# Altium PCB Copy of Tracking-Car.PcbDoc
Units mil, origin at the board's own origin, x right, y up, seen from the top; angles counter-clockwise.
Board outline 2952.76 x 3790 mil, 2 copper layers (Top Layer, Bottom Layer); 70 components, 64 nets, 287 pads, 50 vias.
Unrouted connection lines stored in the file: 9.
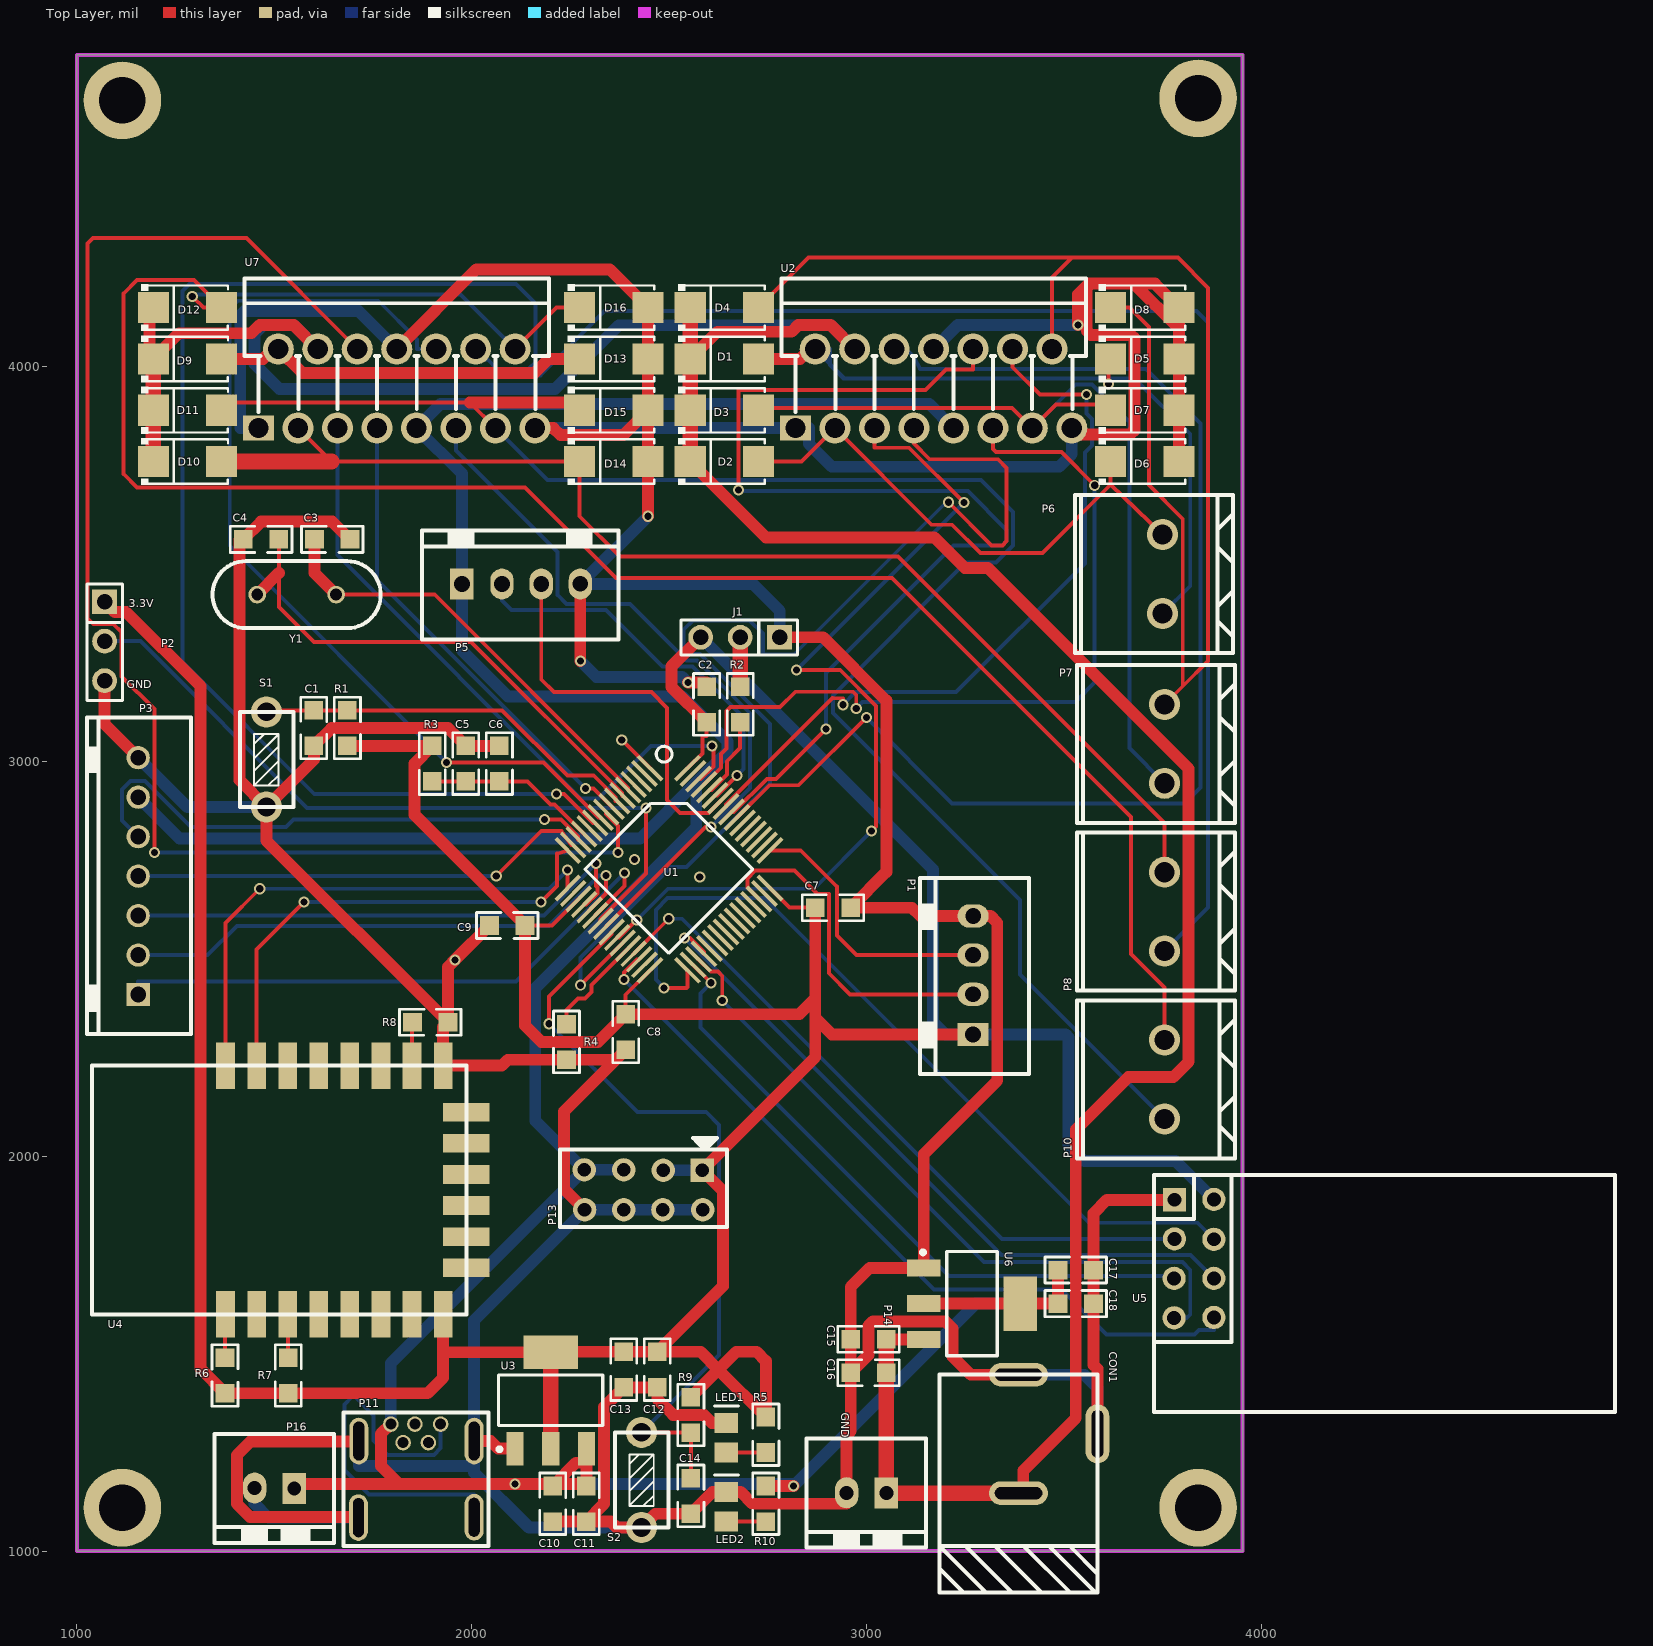
[diagram p0: Top Layer view]
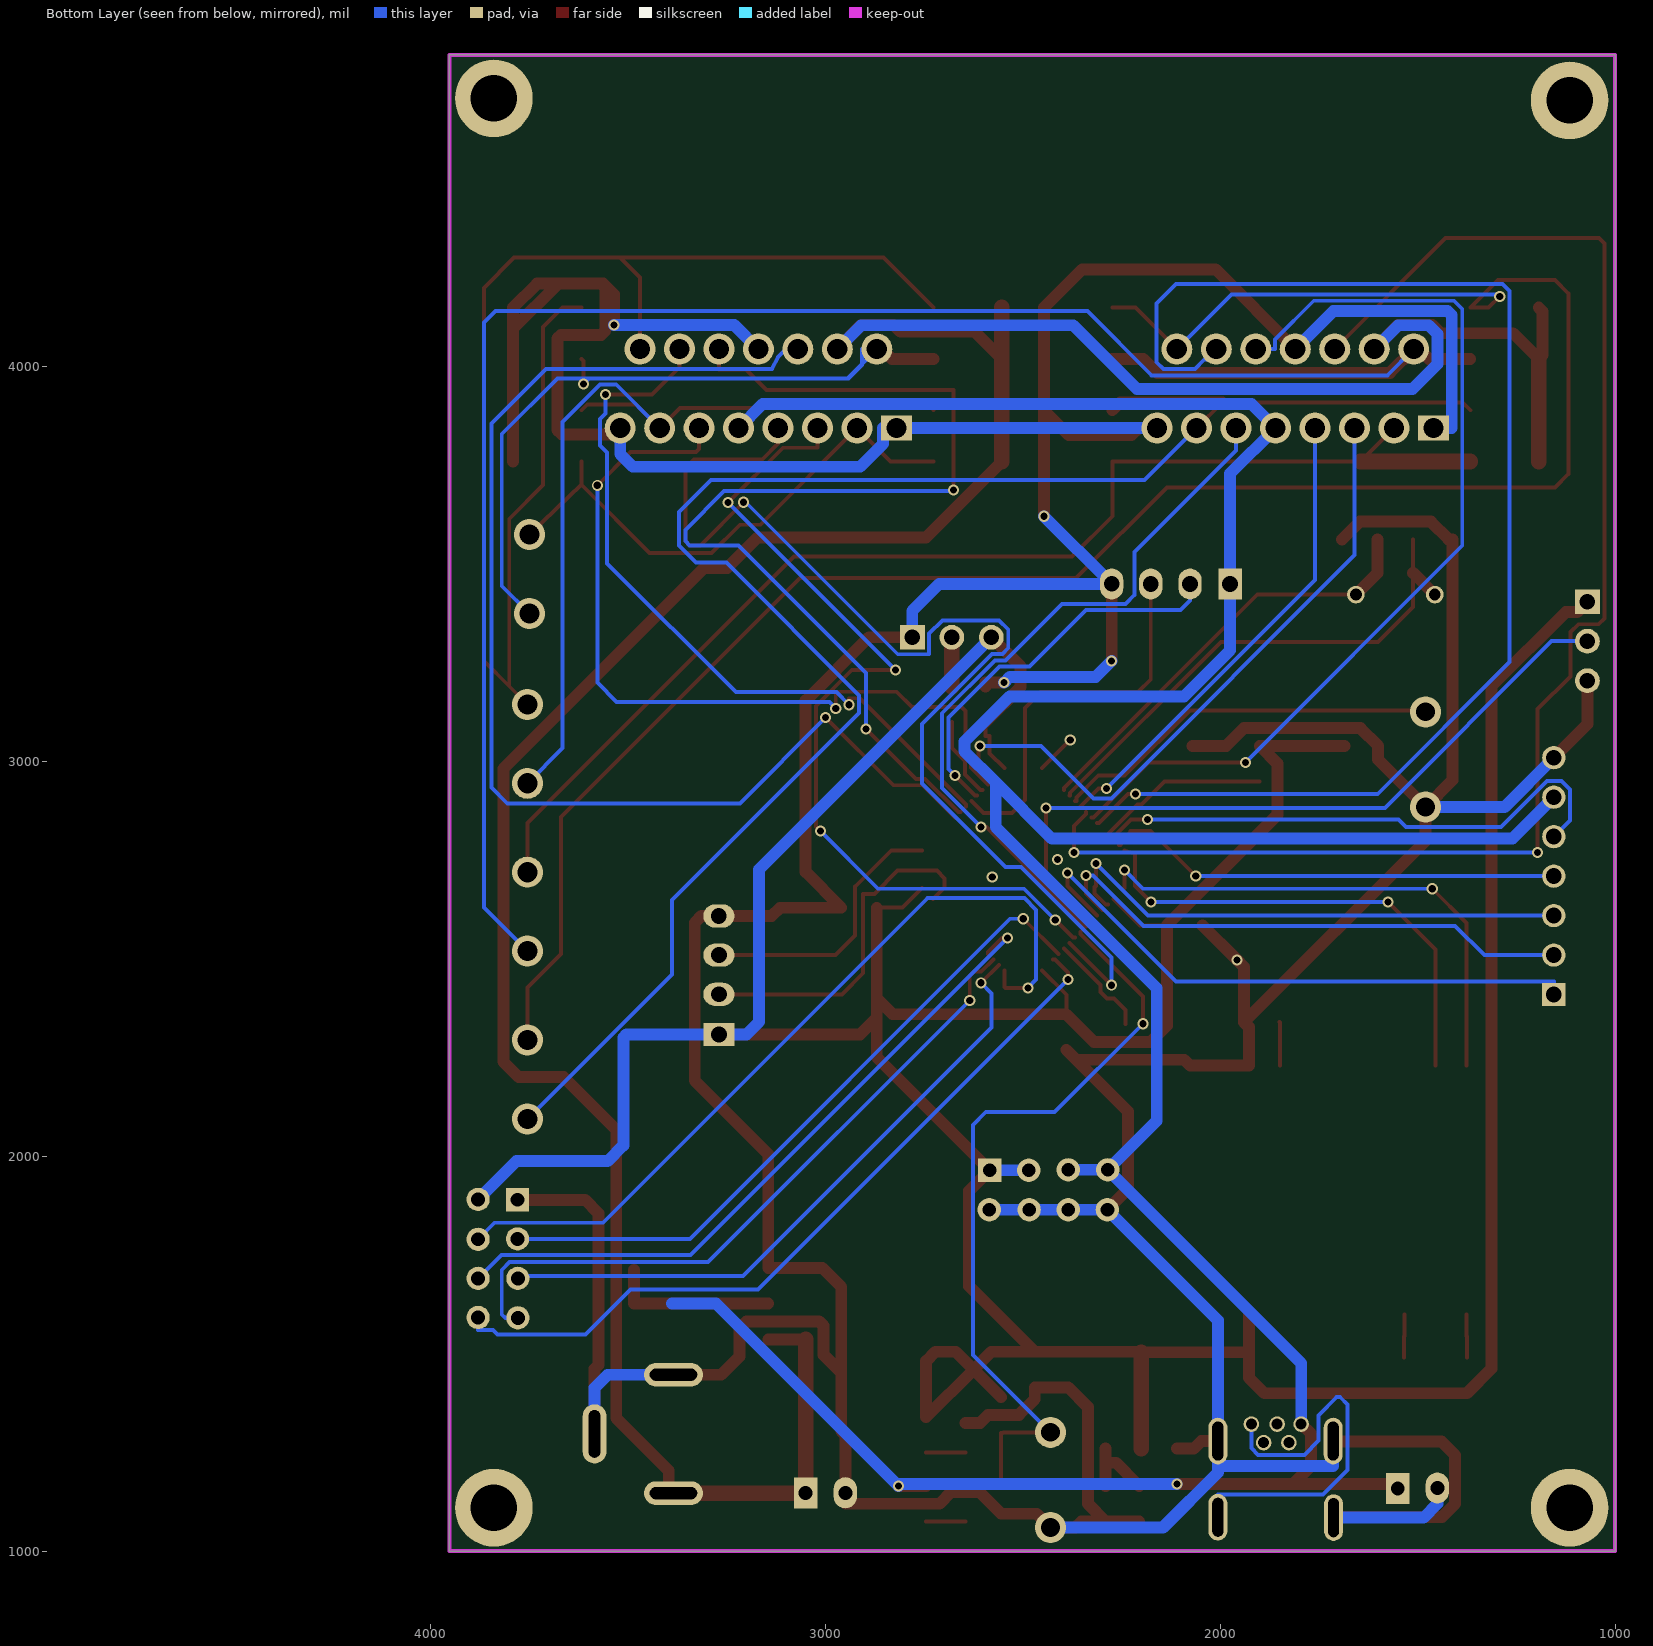
[diagram p1: Bottom Layer view, seen from below]

## Layer stack, top to bottom
Top Solder: solder mask 0.4, Solder Resist, Dk 3.5
Top Layer: signal copper 1.4
Dielectric 1: dielectric 12.6, FR-4, Dk 4.8
Bottom Layer: signal copper 1.4
Bottom Solder: solder mask 0.4, Solder Resist, Dk 3.5

## Board outline
1000,1000 3952.76,1000 3952.76,4790 1000,4790

## Design rules (kind name [scope] priority, off if disabled: settings)
Clearance [All] p1: gap=6 ignorepadtopadclearanceinfootprint=FALSE
HoleSize [All] p1: absolutevalues=TRUE maxlimit=300 minlimit=1 maxpercent=80.000 minpercent=20.000
PolygonConnect [All] p1: connectstyle=Relief reliefconductorwidth=10 reliefentries=4 polygonreliefangle="90 Angle" airgapwidth=10
RoutingVias [All] p1: holewidth=18 width=28 viastyle="Through Hole" minholewidth=18 minwidth=28 maxholewidth=18 maxwidth=28
SolderMaskExpansion [All] p1: expansion=4 istentingtop=FALSE
Width Width_5V [InNet('5V')] p1: maxlimit=40 minlimit=10 preferedwidth=30
Width Width_12V [InNet('12V')] p2: maxlimit=40 minlimit=10 preferedwidth=30
Width Width_3.3V [InNet('3.3V')] p3: maxlimit=40 minlimit=10 preferedwidth=30
Width Width_GND [InNet('GND')] p4: maxlimit=40 minlimit=10 preferedwidth=30
Width [All] p5: maxlimit=40 minlimit=10 preferedwidth=10 minimp=50.000000 maximp=50.000000 favimp=50.000000
29 further rules are at their usual default settings.

## Components (designator, comment, footprint, x,y, rotation, side; value= is the part's Value field where it differs from the comment)
C1 "104" 0805 1600,3040 r90 top
C2 "104" 0805 2595,3190 r270 top
C3 "22P" 0805 1691.5,3562.98 r180 top
C4 "22P" 0805 1421.5,3562.98 r0 top
C5 "10uF" 0805 1985,2950 r90 top
C6 "104" 0805 2070,2950 r90 top
C7 "104" 0805 2870,2630 r0 top
C8 "104" 0805 2390,2360 r270 top
C9 "104" 0805 2135,2585 r180 top
C10 "10uF" 0805 2205,1075 r90 top
C11 "104" 0805 2290,1075 r90 top
C12 "10uF" 0805 2470,1415 r90 top
C13 "104" 0805 2385,1415 r90 top
C14 "104" 0805 2555,1095 r90 top
C15 "10uF" 0805 2960,1537 r0 top
C16 "104" 0805 2960,1452 r0 top
C17 "10uF" 0805 3575,1712 r180 top
C18 "104" 0805 3575,1627 r180 top
CON1 "DC POWER" "Power  2.1mm" 3385,1447 r90 top
D1 "11EQSO6" SMA_L4.3-W2.6-LS5.2-RD 2640,4020 r0 top
D2 "11EQSO6" SMA_L4.3-W2.6-LS5.2-RD 2640,3760 r0 top
D3 "11EQSO6" SMA_L4.3-W2.6-LS5.2-RD 2640,3890 r0 top
D4 "11EQSO6" SMA_L4.3-W2.6-LS5.2-RD 2640,4150 r0 top
D5 "11EQSO6" SMA_L4.3-W2.6-LS5.2-RD 3705,4020 r0 top
D6 "11EQSO6" SMA_L4.3-W2.6-LS5.2-RD 3705,3760 r0 top
D7 "11EQSO6" SMA_L4.3-W2.6-LS5.2-RD 3705,3890 r0 top
D8 "11EQSO6" SMA_L4.3-W2.6-LS5.2-RD 3705,4150 r0 top
D9 "11EQSO6" SMA_L4.3-W2.6-LS5.2-RD 1280,4020 r0 top
D10 "11EQSO6" SMA_L4.3-W2.6-LS5.2-RD 1280,3760 r0 top
D11 "11EQSO6" SMA_L4.3-W2.6-LS5.2-RD 1280,3890 r0 top
D12 "11EQSO6" SMA_L4.3-W2.6-LS5.2-RD 1280,4150 r0 top
D13 "11EQSO6" SMA_L4.3-W2.6-LS5.2-RD 2360,4020 r0 top
D14 "11EQSO6" SMA_L4.3-W2.6-LS5.2-RD 2360,3760 r0 top
D15 "11EQSO6" SMA_L4.3-W2.6-LS5.2-RD 2360,3890 r0 top
D16 "11EQSO6" SMA_L4.3-W2.6-LS5.2-RD 2360,4150 r0 top
J1 "跳线" "单排插针 2.54 1*3" 2780,3315 r180 top
LED1 "红色" LED0805 2645,1250.2 r90 top
LED2 "红色" LED0805 2645,1075.2 r90 top
P1 "XH2.54-4" VH2.54_4 3270,2309 r270 top
P2 "XH2.54-3" "单排插针 2.54 1*3" 1070,3405 r270 top
P3 "XH2.54-7" VH2.54_7 1155,2410 r270 top
P5 "XH2.54-4" VH2.54_4 1975,3450 r180 top
P6 "接线端子" CONN-TH_2P-P5.00_WJ500V-5.08-2P 3750,3475 r90 top
P7 "接线端子" CONN-TH_2P-P5.00_WJ500V-5.08-2P 3755,3045 r90 top
P8 "接线端子" CONN-TH_2P-P5.00_WJ500V-5.08-2P 3755,2620 r90 top
P10 "接线端子" CONN-TH_2P-P5.00_WJ500V-5.08-2P 3755,2195 r90 top
P11 "USB-MINI座" "USB MINI DIP" 1795,1322 r90 top
P13 "双排插针 2.54 2*4" "双排插针 2.54 2*4" 2585,1965 r270 top
P14 "XH2.54-2" VH2.54_2 3050,1147 r0 top
P16 "XH2.54-2" VH2.54_2 1550.39,1159.02 r0 top
R1 "10K" 0805 1685,3040 r90 top
R2 "100K" 0805 2680,3190 r270 top
R3 "10R" 0805 1900,2950 r90 top
R4 "100K" 0805 2240,2335 r270 top
R5 "300" 0805 2745,1250 r90 top
R6 "1K" 0805 1375,1490 r270 top
R7 "1K" 0805 1535,1490 r270 top
R8 "1K" 0805 1940,2340 r180 top
R9 "10K" 0805 2555,1390 r270 top
R10 "300" 0805 2745,1075 r90 top
S1 "key" "按键 轻触  6*3" 1480,2885 r180 top
S2 "key" "按键 轻触  6*3" 2430,1060 r180 top
U1 "STM32F103RCT6" LQFP64 2451.83,2983.52 r315 top
U2 "L298N" MULTIWATT-15_L19.6-W5.0-P1.27-L 3170,3945 r0 top
U3 "SPX1117M3-3.3" SOT223 2109,1260.05 r0 top
U4 "模块 WIFI ESP12E" "模块 WIFI ESP12E" 1986.5,1600 r90 top
U5 "nrf24l01" "模块 NRF24L01" 3780,1892 r0 top
U6 "SPX1117M3-5.0" SOT223 3145.05,1718 r270 top
U7 "L298N" MULTIWATT-15_L19.6-W5.0-P1.27-L 1810,3945 r0 top
Y1 "8M" "晶振 BCY-W2/E4.7" 1456.5,3422.98 r0 top

## Footprints (in the part's own frame and the unit in brackets; to place one, negate y for a bottom-side part, rotate by r counter-clockwise, add the part's x,y. Pads: shape width x height; smd on the part's side, far side on the other; paste and mask are expansions set on the pad)
0805 [mm]
  rect 1.2x1.2 smd: 1(0,0) 2(2.286,0)
  silkscreen extent -0.84,-0.84 3.12,0.84
CONN-TH_2P-P5.00_WJ500V-5.08-2P [mm]
  round 2 hole 1.3 paste+0 mask+0.051: 1(-2.54,0) 2(2.54,0)
  silkscreen extent -5.08,-4.52 5.08,5.64
LED0805 [mm] "Chip Capacitor; Body 2.0 x 1.2 mm (LxW typ)"
  rect 1.3x1.5 smd: 1(0,0) 2(1.9,0)
  silkscreen extent 2.98,-0.76 2.98,0.76
LQFP64 [mm]
  rect 2.2x0.254 smd: 1(0,0) 2(0,-0.5) 3(0,-1) 4(0,-1.5) 5(0,-2) 6(0,-2.5) 7(0,-3) 8(0,-3.5) 9(0,-4) 10(0,-4.5) 11(0,-5) 12(0,-5.5) 13(0,-6) 14(0,-6.5) 15(0,-7) 16(0,-7.5) 33(10.9,-7.5) 34(10.9,-7) 35(10.9,-6.5) 36(10.9,-6) 37(10.9,-5.5) 38(10.9,-5) 39(10.9,-4.5) 40(10.9,-4) 41(10.9,-3.5) 42(10.9,-3) 43(10.9,-2.5) 44(10.9,-2) 45(10.9,-1.5) 46(10.9,-1) 47(10.9,-0.5) 48(10.9,0)
  rect 0.254x2.2 smd: 17(1.7,-9.2) 18(2.2,-9.2) 19(2.7,-9.2) 20(3.2,-9.2) 21(3.7,-9.2) 22(4.2,-9.2) 23(4.7,-9.2) 24(5.2,-9.2) 25(5.7,-9.2) 26(6.2,-9.2) 27(6.7,-9.2) 28(7.2,-9.2) 29(7.7,-9.2) 30(8.2,-9.2) 31(8.7,-9.2) 32(9.2,-9.2) 49(9.2,1.7) 50(8.7,1.7) 51(8.2,1.7) 52(7.7,1.7) 53(7.2,1.7) 54(6.7,1.7) 55(6.2,1.7) 56(5.7,1.7) 57(5.2,1.7) 58(4.7,1.7) 59(4.2,1.7) 60(3.7,1.7) 61(3.2,1.7) 62(2.7,1.7) 63(2.2,1.7) 64(1.7,1.7)
  silkscreen extent -0.51,-7.56 9.26,1.78
MULTIWATT-15_L19.6-W5.0-P1.27-L [mm]
  rect 2x1.6 hole 1.3 paste+0 mask+0.051: 1(-8.89,-2.54)
  round 2 hole 1.3 paste+0 mask+0.051: 2(-7.62,2.54) 3(-6.35,-2.54) 4(-5.08,2.54) 5(-3.81,-2.54) 6(-2.54,2.54) 7(-1.27,-2.54) 8(0,2.54) 9(1.27,-2.54) 10(2.54,2.54) 11(3.81,-2.54) 12(5.08,2.54) 13(6.35,-2.54) 14(7.62,2.54) 15(8.89,-2.54)
  silkscreen extent -9.8,-1.52 9.8,7.09
"Power  2.1mm" [mil]
  oval 60x150 hole 30 slot 120 at 90 deg: 1(-300,0) 3(0,0)
  oval 150x60 hole 30 slot 120 at 0 deg: 2(-150,-200)
  silkscreen extent -552,-200 0,200
SMA_L4.3-W2.6-LS5.2-RD [mm]
  rect 2x2 smd paste+0 mask+0.051: 1(-2.2,0) 2(2.2,0)
  silkscreen extent -2.98,-1.5 2.6,1.5
SOT223 [mm] "SOT-223/SC-73; 4 Leads; Body 6.7 x 7.3 mm, inc. leads (LxW max)"
  rect 1.1x2.15 smd: 1(0.011,-0.001) 2(2.311,-0.001) 3(4.611,-0.001)
  rect 3.5x2.15 smd: 4(2.311,6.199)
  silkscreen extent -1.11,-0.18 5.66,4.72
"USB MINI DIP" [mm]
  round 1 hole 0.7: 1(0,0) 2(-1.194,-0.787) 3(0,-1.549) 4(-1.194,-2.413) 5(0,-3.2)
  oval 3x1.22 hole 0.7 slot 2.5 at 0 deg: 6(-1.093,-5.36) 7(-5.995,-5.36) 8(-1.093,2.057) 9(-6.02,2.082)
  silkscreen extent -7.85,-6.27 0.74,3.05
VH2.54_2 [mm]
  rect 1.5x2 hole 0.9: 1(0,0)
  oval 1.5x2 hole 0.9: 2(-2.55,0.025)
  silkscreen extent -5.14,-3.51 2.56,3.51
VH2.54_4 [mm]
  rect 1.5x2 hole 1.016: 1(0,0)
  oval 1.5x2 hole 1.016: 2(-2.58,0) 3(-5.105,0)
  oval 1.5x2 hole 1: 4(-7.62,0)
  silkscreen extent -10.06,-3.43 2.56,3.58
VH2.54_7 [mm]
  rect 1.5x1.5 hole 1.016: 1(0,0)
  round 1.5 hole 1.016: 2(-2.54,0) 3(-5.08,0) 4(-7.62,0) 5(-10.16,0) 6(-12.7,0) 7(-15.24,0)
  silkscreen extent -17.82,-3.3 2.53,3.4
"单排插针 2.54 1*3" [mm]
  rect 1.6x1.6 hole 1: 1(0,0)
  round 1.6 hole 1: 2(2.54,0) 3(5.08,0)
  silkscreen extent -1.15,-1.12 6.36,1.14
"双排插针 2.54 2*4" [mm]
  rect 1.5x1.5 hole 0.889: 1(0,-0.025)
  round 1.5 hole 0.889: 2(2.54,0) 3(0,-2.54) 4(2.54,-2.565) 5(-0.025,-5.08) 6(2.54,-5.08) 7(-0.025,-7.62) 8(2.54,-7.595)
  silkscreen extent -2.08,-9.17 3.66,1.57
"按键 轻触  6*3" [mm]
  round 2 hole 1.2: 1(0,0) 2(0,-6.121)
  silkscreen extent -1.73,-6.12 1.7,0
"晶振 BCY-W2/E4.7" [mil] "Quartz Crystal, Thru-Hole; 2 Leads; Body 11.35 x 4.65 x 13.46 mm (LxWxH max)"
  round 45 hole 30: 1(0,0) 2(200,0)
  silkscreen extent -113,-85 313,85
"模块 NRF24L01" [mil]
  rect 59.06x59.06 hole 35: 1(0,-2)
  round 59.06 hole 35: 2(100,-1) 3(0,-101) 4(100,-102) 5(-1,-201) 6(100,-201) 7(-1,-301) 8(100,-300)
  silkscreen extent -52,-539 1116,61
"模块 WIFI ESP12E" [mm]
  rect 3x1.2 smd: 1(0,15.5) 2(0,13.5) 3(0,11.5) 4(0,9.5) 5(0,7.5) 6(0,5.5) 7(0,3.5) 8(0,1.5) 15(16.002,1.5) 16(16.002,3.5) 17(16.002,5.5) 18(16,7.5) 19(16.002,9.5) 20(16.002,11.5) 21(16.002,13.5) 22(16.002,15.5)
  rect 1.2x3 smd: 9(3,0) 10(5,0) 11(7,0) 12(9,0) 13(11,0) 14(13,0)
  silkscreen extent 0,0 16,24.08

## Part data
C1 C2 C3 C4 C5 C6 C7 C8 C9 C10 C11 C12 C13 C14 C15 C16 C17 C18: library part "电容 贴片 0805", 单位=个, 名称=贴片电容, 封装=0805
CON1: library part "连接件 电源座"
D1 D2 D3 D4 D5 D6 D7 D8 D9 D10 D11 D12 D13 D14 D15 D16: library part "续流二极管 11EQS06", Average Rectified Current (Io)=500mA, Forward Voltage (Vf@If)=430mV@500mA, JLCPCB Part Class="Extended Part", LCSC Part Name=MBR0530T1G, Manufacturer=onsemi(安森美), Reverse Voltage (Vr)=30V, Add into BOM=yes, Convert to PCB=yes, Datasheet=https://atta.szlcsc.com/upload/public/pdf/source/20160910/1473490306796.PDF, Device=MBR0530T1G, Manufacturer Part=MBR0530T1G, Name=MBR0530T1G, Supplier=LCSC, Supplier Footprint=SOD-123, Supplier Part=C82046, Symbol=MBR0530T1G
J1: library part "联结件 跳线端子 2.54-3", 单位=个, 名称=跳线插针, 封装=直插
LED1 LED2: library part "二极管 贴片发光 0805", 单位=个, 名称=贴片发光二极管, 封装=0805
P1 P5: library part "联结件 XH2.54-4", 单位=套, 名称=联结件, 封装=XH2.54-4
P2: library part "连接件 XH2.54-3", 单位=套, 名称=连接件, 封装=XH2.54-3
P3: library part "连接件 XH2.54-7", 单位=套, 名称=连接件, 封装=XH2.54-7
P6 P7 P8 P10: library part 接线端子_5.08mm_1x2P
P11: library part "联结件 USB-MINI座", 单位=个, 名称=联结件, 封装=440068
P13: library part "联结件 双排插针 2.54 2*4", 单位=个, 名称=联结件, 封装=直插
P14 P16: library part "联结件 XH2.54-2", 单位=套, 名称=联结件, 封装=VH3.96-2
R1 R2 R3 R4 R5 R6 R7 R8 R9 R10: library part "电阻 贴片 0805", 单位=个, 名称=贴片电阻, 封装=0805
S1 S2: library part "按键 轻触 3*6", 单位=个, 名称=开关, 封装="直插 12*12*12"
U1: library part "贴片芯片 STM32F103RCT6", "单片机", 单位=片, 名称=芯片, 封装=LQFP64
U3: library part "贴片芯片 SPX1117M3-3.3", "LDO", 单位=个, 名称=贴片芯片, 封装=SOT223
U5: library part "模块 NRF24L01", 单位=个, 名称=无线模块, 封装=DIP8
U6: library part "贴片芯片 SPX1117M3-5.0", "LDO", 单位=个, 名称=贴片芯片, 封装=SOT223
Y1: library part "晶振 直插矮", 单位=个, 名称=晶振, 封装=直插矮
U2 U7: Designer=U?, Device=L298N, Symbol=L298N
U4: 单位=个, 名称=WIFI模块, 封装=表贴

## Free pads (board coordinates)
  round 196.85 hole 118.11: 1(1115,1110) 2(3840,1110) 3(3840,4680) 4(1115,4675)

## Via types
v1: diameter 28, hole 18, Top Layer to Bottom Layer, 50 vias

## Nets (pads, with @x,y where several pads share a name; then routed paths per layer and width w, separated by ;. In a path a pad name is that pad's centre, name@x,y a point inside that pad or via, vN(x,y) a via of type N, cw(c..) or ccw(c..) an arc to the next point about the centre after c; other vN are vias at no path point)
3.3V: C2.2 C7.1 C8.1 C9.1 C12.2 C13.2 J1.3 P1.1 P2.1 P13.1 P13.3 R1.1 R3.2 R5.2 R6.2 R7.2 R9.1 U1.1 U1.19 U1.32 U1.48 U1.64 U3.2 U3.4 U4.8 U5.2 | length 11342.4
  Top Layer w10: C9.1 2203.64,2585 U1.19 ; v1(2380,3055) 2380.35,3055 U1.1 ; C8.1 2390,2409.45 U1.32 ; U1.64 2584,3021.03 2584,3065 2595,3065 C2.2 ; U1.48 2805.35,2630 C7.1
  Top Layer w30: P2.1 1096.26,3378.74 1125,3378.74 1313,3190.74 1313,1462 R6.2 R7.2 1888,1400 1927.44,1439.44 1927.44,1505 ; R1.1 R3.2 1855,2995 1855,2865 C9.1 2135,2331 2176,2290 2320,2290 C8.1 2830,2360 2870,2400 ; U4.8 1927.44,1505 ; R9.1 2625,1460 ; J1.3 2506,3241 2506,3189 C2.2 ; C7.1 2870,2400 ; P1.1 2912,2309 2870,2351 ; 1927.44,1505 1928.35,1504.09 U3.4 2200.91,1505 C13.2 C12.2 ; C12.2 2636,1671 2636,1913 P13.1 2870,2251 2870,2351 ; C12.2 2580,1505 2625,1460 ; 2625,1460 R5.2 2745,1481.57 2721.57,1505 2670,1505 2625,1460 ; 2870,2351 2870,2400
  Top Layer w40: U3.2 U3.4
  Bottom Layer w30: P13.3 P13.1 ; J1.3 3168,2727 3168,2341 3200,2309 P1.1 3504,2309 3512,2301 3512,2028 3552,1988 3783,1988 U5.2
5V: C10.2 C11.2 C17.2 C18.2 P3.6 P5.1 P11.1 P13.5 P13.7 P16.1 R10.2 U2.9 U3.3 U6.2 U6.4 U7.9 | length 9694.4
  Top Layer w30: P16.1 1561.38,1170 1816,1170 ; P11.1 1770,1297 1770,1216 1816,1170 ; C10.2 C10.2@2210,1170 ; U3.3 U3.3@2290.55,1224 ; R10.2 v1(2815,1165) ; U6.2 U6.4 C18.2 C17.2 ; 1816,1170 v1(2110,1170) C10.2@2210,1170 ; C10.2@2210,1170 2264,1224 U3.3@2290.55,1224 ; C10.2@2210,1170 2285,1170 C11.2 2290.55,1165.55 U3.3@2290.55,1224
  Bottom Layer w30: P3.6 1260,2805 2426.37,2805 2568.85,2947.48 ; P11.1 1795,1476 P13.7 ; v1(2110,1170) 2815,1170 v1@2820,1170 ; P13.5 P13.7 ; v1(2815,1165) v1@2820,1170 ; U2.9 3159,3906 1921,3906 U7.9 1975,3730 P5.1 1975,3282 2091.71,3165.29 2533.34,3165.29 2648,3050.63 2648,3026.63 2568.85,2947.48 ; 3389.09,1627 3277,1627 v1@2820,1170 ; P13.7 2161,2090 2161,2426.5 2568.85,2834.35 2568.85,2947.48
12V: C15.2 C16.2 CON1.1 D1.1 D2.1 D3.1 D4.1 D9.1 D10.1 D11.1 D12.1 P14.1 U2.4 U6.3 U7.4 | length 8144.5
  Top Layer w30: D12.1 1183.39,4140 1183.39,4030 D9.1 1258.39,4085 1442,4085 1463,4106 1549,4106 U7.4 ; D2.1 2745.29,3568.1 3171.33,3568.1 3248.63,3490.8 3307.2,3490.8 3816,2982 3816,2240 3777,2201 3663,2201 3530,2068 3530,1337 3397,1204 3397,1147 CON1.1 ; D1.1 2622.39,4089 2810,4089 2827,4106 2909,4106 U2.4 ; C15.2 3050.55,1536.45 U6.3
  Top Layer w40: D10.1 D11.1 D9.1 ; D2.1 D3.1 D1.1 D4.1 ; C15.2 C16.2 P14.1 CON1.1
  Bottom Layer w30: U7.4 1549.63,4105.37 1472,4105.37 1449.63,4083 1449.63,4007.37 1513,3944 2211,3944 2372.37,4105.37 2909.63,4105.37 U2.4
Avoid_Echo: P5.3 U1.58 | length 984.9
  Top Layer w10: P5.3 2176,3208 2208,3176 2455,3176 2495,3136 2495,2903 2528,2870 2600,2870 U1.58
Avoid_Motor: P2.2 U1.23 | length 1879.6
  Top Layer w10: U1.23 2326.56,2601.76 2441,2716.21 v1(2441,2883)
  Bottom Layer w10: P2.2 1161,3305 1583,2883 v1(2441,2883)
Avoid_Trig: P5.2 U1.59 | length 1007.2
  Top Layer w10: U1.59 2621.29,2913.92 v1(2672,2964.63)
  Bottom Layer w10: P5.2 2076.57,3408 2100.95,3383.63 2339.66,3383.63 2482.79,3240.5 2559.59,3240.5 2688.23,3111.87 2688.23,2980.86 v1(2672,2964.63)
BOOT0: R2.2 U1.60 | length 207.5
  Top Layer w10: U1.60 2607.37,2927.84 2647,2967.47 2647,3001 2680,3034 R2.2
BOOT1: R4.1 U1.28 | length 267.2
  Top Layer w10: R4.1 2240,2370.81 2269.19,2400 2287.28,2400 2303.28,2416 2303.28,2434.09 U1.28
GND: C1.1 C2.1 C3.1 C4.1 C5.2 C6.2 C7.2 C8.2 C9.2 C10.1 C11.1 C12.1 C13.1 C14.1 C15.1 C16.1 C17.1 C18.1 CON1.2 CON1.3 D5.2 D6.2 D7.2 D8.2 D13.2 D14.2 D15.2 D16.2 J1.1 LED1.2 LED2.2 P1.4 P2.3 P3.7 P5.4 P11.6 P11.8 P11.9 P13.2 P13.4 P13.6 P13.8 P14.2 P16.2 R4.2 R8.1 S1.1 S2.1 U1.12 U1.18 U1.31 U1.47 U1.63 U2.1 U2.8 U2.15 U3.1 U4.15 U5.1 U6.1 U7.1 U7.8 U7.15 | length 21010.4
  Top Layer w30: P2.3 1070,3095 P3.7 ; C3.1 1646.48,3608 1466.52,3608 C4.1 1412,3562.98 1412,2953 S1.1 ; P11.9 1713.03,1087 1438,1087 1405,1120 1405,1243 1440,1278 1714.02,1278 P11.8 ; U7.8 2012,4247 2349.61,4247 D16.2 D13.2 D15.2 ; P11.6 2048,1278.98 2066.98,1260 U3.1 ; C9.2 v1(1957.5,2497.5) 1940,2480 R8.1 ; C6.2 C5.2 1940,3085 1645,3085 C1.1 1600,3005 S1.1 ; U7.15 2207,3845 2225,3827 2383.61,3827 D15.2 ; C10.1 C11.1 ; v1(2275,3255) P5.4 ; P13.8 2234,1917 2234,2114 2365,2245 ; C8.2 2365,2245 ; v1(2446.61,3621.61) D14.2 D15.2 ; v1(2547.5,3200) 2595,3200 C2.1 ; LED1.2 2608,1325 2588,1345 2510,1345 2470,1385 C12.1 C13.1 2335,1365 2335,1120 C11.1 ; J1.1 2890,3315 3050.5,3154.5 3050.5,2720.5 C7.2 3115,2630 3136,2609 P1.4 3314,2609 3331,2592 3331,2192 3145,2006 U6.1 3008,1717.55 2960,1669.55 C15.1 C16.1 ; CON1.3 3264,1447 3218,1493 3218,1564 3200,1582 3016,1582 3005,1571 3005,1497 C16.1 ; U2.15 3520,3829 3667.76,3829 3678.76,3840 3678.76,4072 3669.76,4081 3568,4081 3558,4091 3558,4201 3568,4211 ; v1(3536,4106) 3536,4184 3563,4211 3568,4211 ; CON1.2 3585,1462 3575,1472 C18.1 C17.1 3575,1856 3609,1890 U5.1 ; 3676.84,4211 3791.61,4096.23 ; D6.2 D7.2 D5.2 3791.61,4096.23 ; S1.1 1480,2800 R8.1 ; R8.1 1927.44,2327.44 U4.15 2076,2229.99 2091.01,2245 R4.2 2365,2245 ; C11.1 2352,1075 2367,1060 S2.1 2465,1095 C14.1 2610,1150 LED2.2 2681,1150 2711,1120 2949.61,1120 P14.2 2949.61,1294 2960,1304.39 C16.1 ; 3568,4211 3730.61,4211 D8.2 3791.61,4096.23
  Bottom Layer w30: P3.7 1280,2885 S1.1 ; P16.2 1450,1120 1485.01,1084.99 P11.9 ; U7.1 1413.63,3845 1413.63,4131 1424,4141.37 1713.63,4141.37 U7.8 ; P11.8 1714.02,1216 2006.01,1216 ; U7.15 U2.1 2854,3845 2854,3805 2912,3747 3488,3747 3520,3779 U2.15 ; v1(2275,3255) 2315.5,3214.5 2533,3214.5 v1(2547.5,3200) ; S2.1 2145.01,1060 2006.01,1199 2006.01,1216 ; v1(2446.61,3621.61) P5.4 2711.8,3450 2780,3381.8 J1.1 ; P13.2 P13.4 P13.6 P13.8 2006.01,1585.01 P11.6 2006.01,1216 ; U2.8 3231,4106 v1(3536,4106) ; CON1.3 3552,1447 3585,1414 CON1.2
  other v1: 2577.5,2707.5 2412.5,2752.5
Motor_LF_1: U1.26 U2.5 | length 2251.4
  Top Layer w10: U1.26 2373.52,2554.8 2417.72,2599 v1(2418,2599) ; v1(2823,3232) 2933.5,3232 3024.5,3141 3024.5,2835.5 v1(3013,2824) ; U2.5 3020,3795 3108,3795 v1(3247,3656)
  Bottom Layer w10: v1(2418,2599) 2497,2678 2867,2678 v1(3013,2824) ; v1(2823,3232) v1(3247,3656)
Motor_LF_2: U1.27 U2.7 | length 2968.3
  Top Layer w10: v1(2275,2433.65) U1.27 ; U2.7 3120,3805.63 3159.73,3765.89 3333.11,3765.89 3355,3744 3355,3559 3344,3548 3317,3548 v1(3208,3657)
  Bottom Layer w10: v1(2275,2433.65) 2275,2503.73 2504.35,2733.08 2543.45,2733.08 2755,2944.63 2755,3095.53 2578.02,3272.5 2552,3272.5 2537,3287.5 2537,3335 2560,3358 2704,3358 2737.49,3324.51 2737.49,3272 2816.96,3272 3201.96,3657 v1(3208,3657)
Motor_LF_PWM: U1.55 U2.6 | length 3167.9
  Top Layer w10: U1.55 2753.72,2940.21 2828.17,2940.21 v1(2999.5,3111.54)
  Bottom Layer w10: v1(2999.5,3111.54) 3217.04,2894 3806,2894 3846,2934 3846,3856 3707.37,3994.63 3136,3994.63 3120,4025 3100,4045 U2.6
Motor_LR_1: U1.62 U7.5 | length 1687.2
  Top Layer w10: U1.62 2579.53,2955.68 2612,2988.15 2612,3040 v1(2609,3040)
  Bottom Layer w10: U7.5 1660,3523 2276,2907 2321,2907 2454,3040 v1(2609,3040)
Motor_LR_2: U1.8 U7.7 | length 1217.1
  Top Layer w10: v1(2288,2932) 2308.48,2932 U1.8
  Bottom Layer w10: U7.7 1760,3460 v1(2288,2932)
Motor_LR_PWM: U1.9 U7.6 | length 3735.5
  Top Layer w10: v1(1196,2770) 1196,3133 1113,3216 1113,3328 1093,3348 1042,3348 1027,3363 1027,4312 1041,4326 1429,4326 U7.6 ; U1.9 2340.48,2866.95 2370,2837.43 v1(2370,2770)
  Bottom Layer w10: v1(1196,2770) v1(2370,2770)
Motor_RF_1: U1.56 U2.10 | length 2734.2
  Top Layer w10: U1.56 2663.05,2872.16 2747.34,2956.46 2771.16,2956.46 v1(2897.37,3082.66) ; v1(2676,3688) 2676,3941 3149,3941 3201,3993 3270,3993 U2.10
  Bottom Layer w10: v1(2676,3688) 2679,3685 3257,3685 3355,3587 3355,3559 3344,3548 3220.78,3548 2897.37,3224.59 v1(2897.37,3082.66)
Motor_RF_2: U1.57 U2.12 | length 1893.2
  Top Layer w10: U1.57 2643.92,2891.29 2913.63,3161 2940,3160 v1(2940,3144) ; U2.12 3370,3999 3439,3930 v1(3557,3930)
  Bottom Layer w10: v1(2940,3144) 2972,3176 3227,3176 3553,3502 3553,3783 3571,3801 3571,3868 3557,3882 v1(3557,3930)
Motor_RF_PWM: U1.61 U2.11 | length 2076.3
  Top Layer w10: U1.61 2631,2984.52 2631,3019 2645,3033 2645,3128 2655,3138 2781,3138 2820,3177 2965.87,3177 2974,3168.87 v1(2974,3135) ; U2.11 3320,3792 3328,3784 3494,3784 v1(3578,3700)
  Bottom Layer w10: v1(2974,3135) 2990,3151 3529,3151 3578,3200 v1(3578,3700)
Motor_RR_1: U1.10 U7.10 | length 2421
  Top Layer w10: v1(1936,2998) 2181.59,2998 2321.35,2858.24 U1.10
  Bottom Layer w10: U7.10 1861,4045 1861,4069.5 1763.13,4167.37 1408,4167.37 1387,4146.37 1387,3547 v1(1936,2998)
Motor_RR_2: U1.11 U7.12 | length 3420.3
  Top Layer w10: v1(2215,2918) 2233.75,2918 2307.43,2844.32 U1.11
  Bottom Layer w10: U7.12 2010,4018 2040.63,4018 2064,3994.63 2144,3994.63 2161,4011.63 2161,4161 2112,4210 1285,4210 1267,4192 1267,3252 1601,2918 v1(2215,2918)
Motor_RR_PWM: U1.24 U7.11 | length 1840.3
  Top Layer w10: U1.24 2591.84,2834 v1(2606,2834)
  Bottom Layer w10: U7.11 1960,3788 2217,3531 2217,3422.63 2240,3399.63 2400.88,3399.63 2544,3256.5 2571.02,3256.5 2705,3122.53 2705,2933 v1(2606,2834)
NetC3_2: C3.2 U1.5 Y1.2 | length 1110.6
  Top Layer w10: Y1.2 1906.22,3422.98 2396.15,2933.05 U1.5
  Top Layer w30: C3.2 1601.5,3477.98 Y1.2
NetC4_2: C4.2 U1.6 Y1.1 | length 1322.1
  Top Layer w10: C4.2 1511.5,3477.98 1511.5,3391.5 1600,3303 1998.36,3303 2380.15,2921.21 2380.15,2913.92 U1.6
  Top Layer w30: Y1.1 1511.5,3477.98
NetC5_1: C5.1 C6.1 R3.1 U1.13 | length 440.1
  Top Layer w10: R3.1 C5.1 C6.1 2141.23,2950 2200,2891.23 2210.05,2891.23 U1.13
NetD1_2: D1.2 D5.1 P6.1 U2.2 | length 1889.9
  Top Layer w10: v1(3613,3957) 3613,4014.61 D5.1
  Top Layer w30: D1.2 2831.81,4020 2856.81,4045 U2.2
  Bottom Layer w10: v1(3613,3957) 3599,3971 ; P6.1 3820,3445 3820,3830 3679,3971 3599,3971 ; 2908,4007 2944,3971 ; 2908,4007 U2.2 2908,4045 2908,4007 ; 2908,4007 2908,4005 2942,3971 2944,3971 ; 2944,3971 3599,3971
NetD2_2: D2.2 D6.1 P6.2 U2.3 | length 1371
  Top Layer w10: D2.2 2835,3760 U2.3 3165,3600 3217,3600 3288.8,3528.19 3445.19,3528.19 3618.39,3701.39 ; D6.1 3618.39,3701.39 ; P6.2 3618.39,3701.39
NetD3_2: D3.2 D7.1 P7.1 U2.13 | length 2232.7
  Top Layer w10: D3.2 2726.61,3896 3369,3896 U2.13 3480,3905 3603.39,3905 D7.1
  Bottom Layer w10: U2.13 3530,3955 3571,3955 3666,3860 3666,3034 P7.1
NetD4_2: D4.2 D8.1 P7.2 U2.14 | length 3637.8
  Top Layer w10: D4.2 2853.18,4276.57 3520,4276.57 ; U2.14 3470,4226.57 3520,4276.57 ; D8.1 3665.76,4150 3715,4100.76 3715,3701 3801,3615 3801,3191 ; P7.2 3801,3191 ; 3520,4276.57 3788.43,4276.57 3865,4200 3865,3255 3801,3191
NetD9_2: D9.2 D13.1 P8.1 U7.2 | length 5056.7
  Top Layer w30: D9.2 1471.81,4020 1496.81,4045 U7.2 1570.37,3984.63 2159.63,3984.63 2195,4020 D13.1
  Bottom Layer w10: U7.2 1576.37,3978.63 2173.63,3978.63 2336.37,4141.37 3836.06,4141.37 3865,4112.43 3865,2630 P8.1
NetD10_2: D10.2 D14.1 P8.2 U7.3 | length 3093.7
  Top Layer w10: U7.3 1645,3760 D14.1 2273.39,3621.61 2375,3520 3080,3520 3755,2845 P8.2
  Top Layer w40: D10.2 1645,3760
NetD11_2: D11.2 D15.1 P10.1 U7.13 | length 4533.4
  Top Layer w10: D11.2 1386.61,3910 1995,3910 U7.13
  Top Layer w30: 1995,3910 2253.39,3910 D15.1
  Bottom Layer w10: U7.13 2192,3713 3290,3713 3371,3632 3371,3547 3328,3504 3251,3504 2915,3168 2915,3122.96 3389,2648.96 3389,2461 P10.1
NetD12_2: D12.2 D16.1 P10.2 U7.14 | length 5431.1
  Top Layer w10: v1(1292,4178) 1320,4150 D12.2 1296.75,4219.86 1152,4219.86 1118.43,4186.3 1118.43,3728.2 1152,3694.63 2135.32,3694.63 2364.95,3465 3065,3465 3670,2860 3670,2512.55 3755,2427.55 P10.2 ; U7.14 2215,4150 D16.1
  Bottom Layer w10: v1(1292,4178) 1297.37,4183.37 1971.63,4183.37 U7.14
NetJ1_2: J1.2 R2.1 | length 125
  Top Layer w40: R2.1 J1.2
NetLED1_1: LED1.1 R5.1 | length 100.1
  Top Layer w10: LED1.1 2645.2,1250 R5.1
NetLED2_1: LED2.1 R10.1 | length 100.1
  Top Layer w10: LED2.1 2645.2,1075 R10.1
NetP11_5: P11.5 P11.7 | length 994.2
  Bottom Layer w10: P11.5 1921,1261 1904,1244 1787,1244 1751,1280 1751,1344 1705,1390 1696,1390 1678,1372 1678,1206 1740,1144 2006.02,1144 P11.7
NetR6_1: R6.1 U4.1 | length 110.5
  Top Layer w10: R6.1 1375,1544 1376.26,1545.26 U4.1
NetR7_1: R7.1 U4.3 | length 110.5
  Top Layer w10: U4.3 1533.74,1545.26 1535,1544 R7.1
NetR8_2: R8.2 U4.16 | length 110.5
  Top Layer w10: U4.16 1848.7,2338.7 R8.2
NRF24L01_CE: U1.29 U5.3 | length 1742.7
  Top Layer w10: U1.29 v1(2499.02,2601.98)
  Bottom Layer w10: v1(2499.02,2601.98) 2532.51,2601.98 3343.49,1791 U5.3
NRF24L01_IRQ: U1.30 U5.8 | length 1972.8
  Top Layer w10: v1(2386,2448) 2386,2466.34 2418.78,2499.12 U1.30
  Bottom Layer w10: v1(2386,2448) 3171,1663 3494,1663 3608,1549 3831,1549 3842,1560 3880,1560 U5.8
NRF24L01_MISO: U1.35 U5.7 | length 1765.1
  Top Layer w10: U1.35 2605.44,2468 2624,2468 2634.49,2457.51 v1(2634.49,2395)
  Bottom Layer w10: v1(2634.49,2395) 3297.49,1732 3800,1732 3820,1712 3820,1600 3811,1591 U5.7
NRF24L01_MOSI: U1.36 U5.6 | length 1768.3
  Top Layer w10: v1(2538.5,2553.5) 2552.99,2553.5 2588.24,2518.25 U1.36
  Bottom Layer w10: v1(2538.5,2553.5) 3342,1750 3821,1750 U5.6
NRF24L01_NSS: U1.33 U5.4 | length 2092.1
  Top Layer w10: v1(2487,2427) 2544,2427 2546.48,2429.48 U1.33
  Bottom Layer w10: v1(2487,2427) 2466.27,2447.73 2466.27,2624.27 2496,2654 2741,2654 3563,1832 3838,1832 U5.4
NRF24L01_SCK: U1.34 U5.5 | length 1655.1
  Top Layer w10: U1.34 v1(2605.8,2439.8)
  Bottom Layer w10: v1(2605.8,2439.8) 2579,2413 2579,2327 3209,1697 3779,1697 U5.5
PC8: U1.39
PC9: U1.40
PC10: U1.51
PC11: U1.52
PC12: U1.53
PC13: U1.2
PC14: U1.3
PC15: U1.4
RST: C1.2 R1.2 S1.2 U1.7 | length 990.7
  Top Layer w10: S1.2 1484,3130 C1.2 1642,3130 R1.2 2077,3130 2242.56,2964.44 2309.09,2964.44 2364.15,2909.37 2364.15,2900 U1.7
SWCLK: P1.3 U1.49 | length 696.5
  Top Layer w10: U1.49 2833.39,2774.73 2925,2683.12 2925,2560 2975,2510 P1.3
SWDIO: P1.2 U1.46 | length 891.8
  Top Layer w10: U1.46 2698,2681.67 2698,2704 2718,2724 2817,2724 2876,2665 2905,2665 2905,2464 2958.43,2410.57 P1.2
Switch_Key: C14.2 R9.2 S2.2 U1.25 | length 1937
  Top Layer w10: v1(2196,2336) 2196,2405.11 2354.4,2563.51 U1.25 ; S2.2 2549,1301 R9.2@2555,1295 ; C14.2 2555,1242 R9.2@2555,1295 ; R9.2 R9.2@2555,1295
  Bottom Layer w10: v1(2196,2336) 2420,2112 2594,2112 2626,2080 2626,1497 S2.2
Tracking_L1: P3.5 U1.14 | length 1383.5
  Top Layer w10: v1(2184,2853) 2225.65,2853 2268.8,2809.86 2268.8,2802.56 U1.14
  Bottom Layer w10: P3.5 1114,2851 1114,2929 1136,2951 1172,2951 1289,2834 1529,2834 1548,2853 v1(2184,2853)
Tracking_L2: P3.4 U1.15 | length 1167.1
  Top Layer w10: v1(2062,2710) 2176,2824 2226.81,2824 2252.8,2788.64 U1.15
  Bottom Layer w10: P3.4 v1(2062,2710)
Tracking_Mi: P3.3 U1.20 | length 1336.4
  Top Layer w10: U1.20 2290.01,2638.32 2318,2666.31 2318,2682 2315,2685 v1(2315,2742)
  Bottom Layer w10: P3.3 2183,2610 v1(2315,2742)
Tracking_R1: P3.1 U1.22 | length 1517.2
  Top Layer w10: U1.22 2387,2684.84 v1(2387,2718)
  Bottom Layer w10: P3.1 1155,2443 2112,2443 v1(2387,2718)
Tracking_R2: P3.2 U1.21 | length 1373.4
  Top Layer w10: U1.21 2340,2665.68 v1(2340,2712)
  Bottom Layer w10: P3.2 1331,2510 1405,2584 2194,2584 2322,2712 v1(2340,2712)
U2_RX: U1.17 U4.22 | length 1328.4
  Top Layer w10: U4.22 1376.26,2591.26 v1(1463,2678) ; U1.17 v1(2243.04,2725)
  Bottom Layer w10: v1(1463,2678) 2196.04,2678 v1(2243.04,2725)
U2_TX: U1.16 U4.21 | length 1231.6
  Top Layer w10: U4.21 1455,2524 v1(1575,2644) ; v1(2175,2644) 2216,2685 2216,2766.73 U1.16
  Bottom Layer w10: v1(1575,2644) v1(2175,2644)
pads on no net: P11.2 P11.3 P11.4 U1.37 U1.38 U1.41 U1.42 U1.43 U1.44 U1.45 U1.50 U1.54 U4.2 U4.4 U4.5 U4.6 U4.7 U4.9 U4.10 U4.11 U4.12 U4.13 U4.14 U4.17 U4.18 U4.19 U4.20

## Keep-outs
Keep-Out Layer:
  the board outline again, w10

## Silkscreen, mask and mechanical layers (free items; w line width, h text height)
Top Overlay:
  text "3.3V" at 1131,3391 h20
  text "GND" at 1126,3186 h20
  text "GND" at 2936,1351 h20 r270